# EAGLE board Astable 555 Timer (EAGLE 9.6.2)
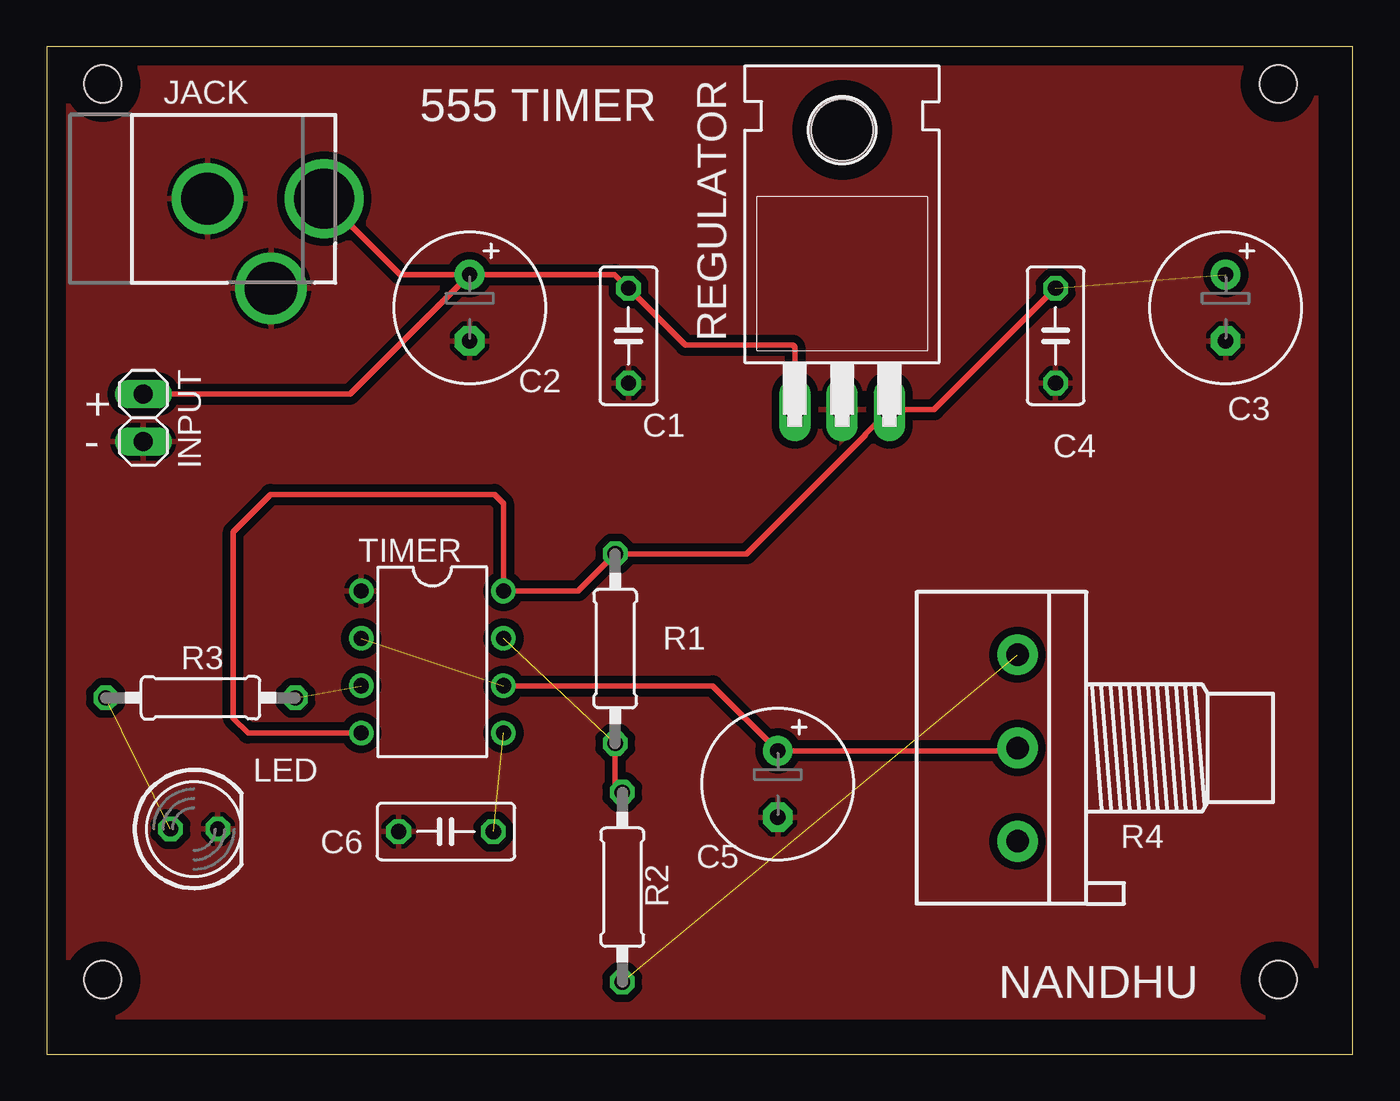
[diagram p0: board, top side]

Size 70 x 54 mm. Coordinates in mm from the lower left corner, seen from the top.
Outline: 0,0 70,0 70,54 0,54 0,0
Copper layers (1*16): Top 0.035mm / dielectric 1.5mm / Bottom 0.035mm
Design rules "default": minimum track width 6mil, minimum drill 0.35mm, track to track 6mil, track to pad 6mil, pad to pad 6mil, via to via 6mil, smd to smd 6mil, copper to edge 40mil, drill to drill 6mil, minimum pad ring 10mil, minimum via ring 8mil, stop-mask expansion 4mil, vias tented up to drill 0mil, thermal gap 10mil
Net classes: 0 default: width 0.305 mm, drill 0.305 mm, clearance 0.254 mm; 1 Power: width 0.406 mm, drill 0.406 mm, clearance 0.305 mm
Holes 2 mm at 3,52 66,52 66,4 3,4

## Footprints (pad centres in the part's own frame; a part is rotated, then mirrored left to right if it is on the bottom)
C050-030X075 = drill 0.813 octagon: 1 -2.54,0; 2 2.54,0
E3,5-8 = drill 0.813 pad 1.6: + -1.778,0 | drill 0.813 pad 1.6 octagon: - 1.778,0
1X02 = drill 1.016 long: 1 -1.27,0; 2 1.27,0
DCJACK_2MM_PTH = drill 2.8: GND 0,7.35; GNDBREAK 4.8,10.75 | drill 3.2: PWR 0,13.6
LED5MM = drill 0.813 octagon: A -1.27,0; K 1.27,0
0207/10 = drill 0.813 octagon: 1 -5.08,0; 2 5.08,0
3RP/1610N = drill 1.2 pad 2.184: 1 -5,0; 2 0,0; 3 5,0
TO220H = drill 1.118 long: 1 -2.54,-10.16; 2 0,-10.16; 3 2.54,-10.16 | hole 3.302: 0,4.826
DIL08 = drill 0.813 pad 1.27: 1 -3.81,-3.81; 2 -1.27,-3.81; 3 1.27,-3.81; 4 3.81,-3.81; 5 3.81,3.81; 6 1.27,3.81; 7 -1.27,3.81; 8 -3.81,3.81

## Placement (x,y rotation side)
C1  0.1uF  [C050-030X075]  31.18,38.51 270 top
C2  10uF  [E3,5-8]  22.67,40.01 270 top
C3  10uF  [E3,5-8]  63.18,40.01 270 top
C4  0.1uF  [C050-030X075]  54.07,38.51 270 top
C5  10uF  [E3,5-8]  39.18,14.48 270 top
C6  0.1uF  [C050-030X075]  21.4,11.93 180 top
INPUT  2P  [1X02]  5.18,34.1 270 top
JACK  2.0 MM  [DCJACK_2MM_PTH]  1.27,45.85 270 top
LED  RED  [LED5MM]  7.9,12.07 0 top
R1  10K  [0207/10]  30.47,21.74 90 top
R2  1K  [0207/10]  30.85,8.95 90 top
R3  330R  [0207/10]  8.25,19.1 0 top
R4  100K  [3RP/1610N]  52.03,16.41 90 top
REGULATOR  7805T  [TO220H]  42.63,44.7 0 top
TIMER  NE555N  [DIL08]  20.67,21.02 270 top

## Library data of the parts
C1-C6 = rcl; SPICEPREFIX: C
INPUT = pinhead
JACK = adafruit
LED = led
R1-R3 = rcl; SPICEPREFIX: R
R4 = pot
REGULATOR TIMER = linear

## Nets
+5V: C3.+ C4.1 R1.2 REGULATOR.3 TIMER.4 TIMER.8
+12V: C1.1 C2.+ INPUT.1 JACK.PWR REGULATOR.1
CV: C6.1 TIMER.5
GND: C1.2 C2.- C3.- C4.2 C5.- C6.2 INPUT.2 JACK.GND JACK.GNDBREAK LED.K REGULATOR.2 TIMER.1
N$2: R1.1 R2.2 TIMER.7
N$4: R2.1 R4.3
N$8: LED.A R3.1
OUT: R3.2 TIMER.3
THRESHOLD: C5.+ R4.2 TIMER.2 TIMER.6

## Tracks (layer width: path | path; a pad name or v marks a point on that pad's centre or on a via)
+5V  (1 unrouted)
  Top 0.305: C4.1 47.56,34.54 REGULATOR.3 43.88,33.24 43.88,33.19 37.51,26.82 R1.2 28.48,24.83 TIMER.8 24.48,29.52 24,30 12,30 10,28 10,18 10.79,17.21 TIMER.4
+12V
  Top 0.305: JACK.PWR 18.93,41.79 C2.+ | C2.+ 30.44,41.79 C1.1 34.23,38 40,38 40.09,37.91 REGULATOR.1 | INPUT.1 16.25,35.37 C2.+
CV  (1 unrouted)
GND
  pour Top (isolate 0.406): 2,54 66,54 68,52 68,4 66,2 2,2 0,4 0,52
N$2  (1 unrouted)
  Top 0.305: R1.1 30.47,14.41 R2.2
N$4  (1 unrouted)
N$8  (1 unrouted)
OUT  (1 unrouted)
THRESHOLD  (1 unrouted)
  Top 0.305: R4.2 51.88,16.26 C5.+ 35.69,19.75 TIMER.6

## Text on the board
tNames: 555 TIMER | + | - | NANDHU